# Altium PCB ESP8266Watch-v1-PCB.pcbdoc
Units mil, origin at the board's own origin, x right, y up, seen from the top; angles counter-clockwise.
Board outline 2584.8 x 2603.82 mil, 2 copper layers (Top Layer, Bottom Layer); 15 components, 16 nets, 60 pads, 6 vias.
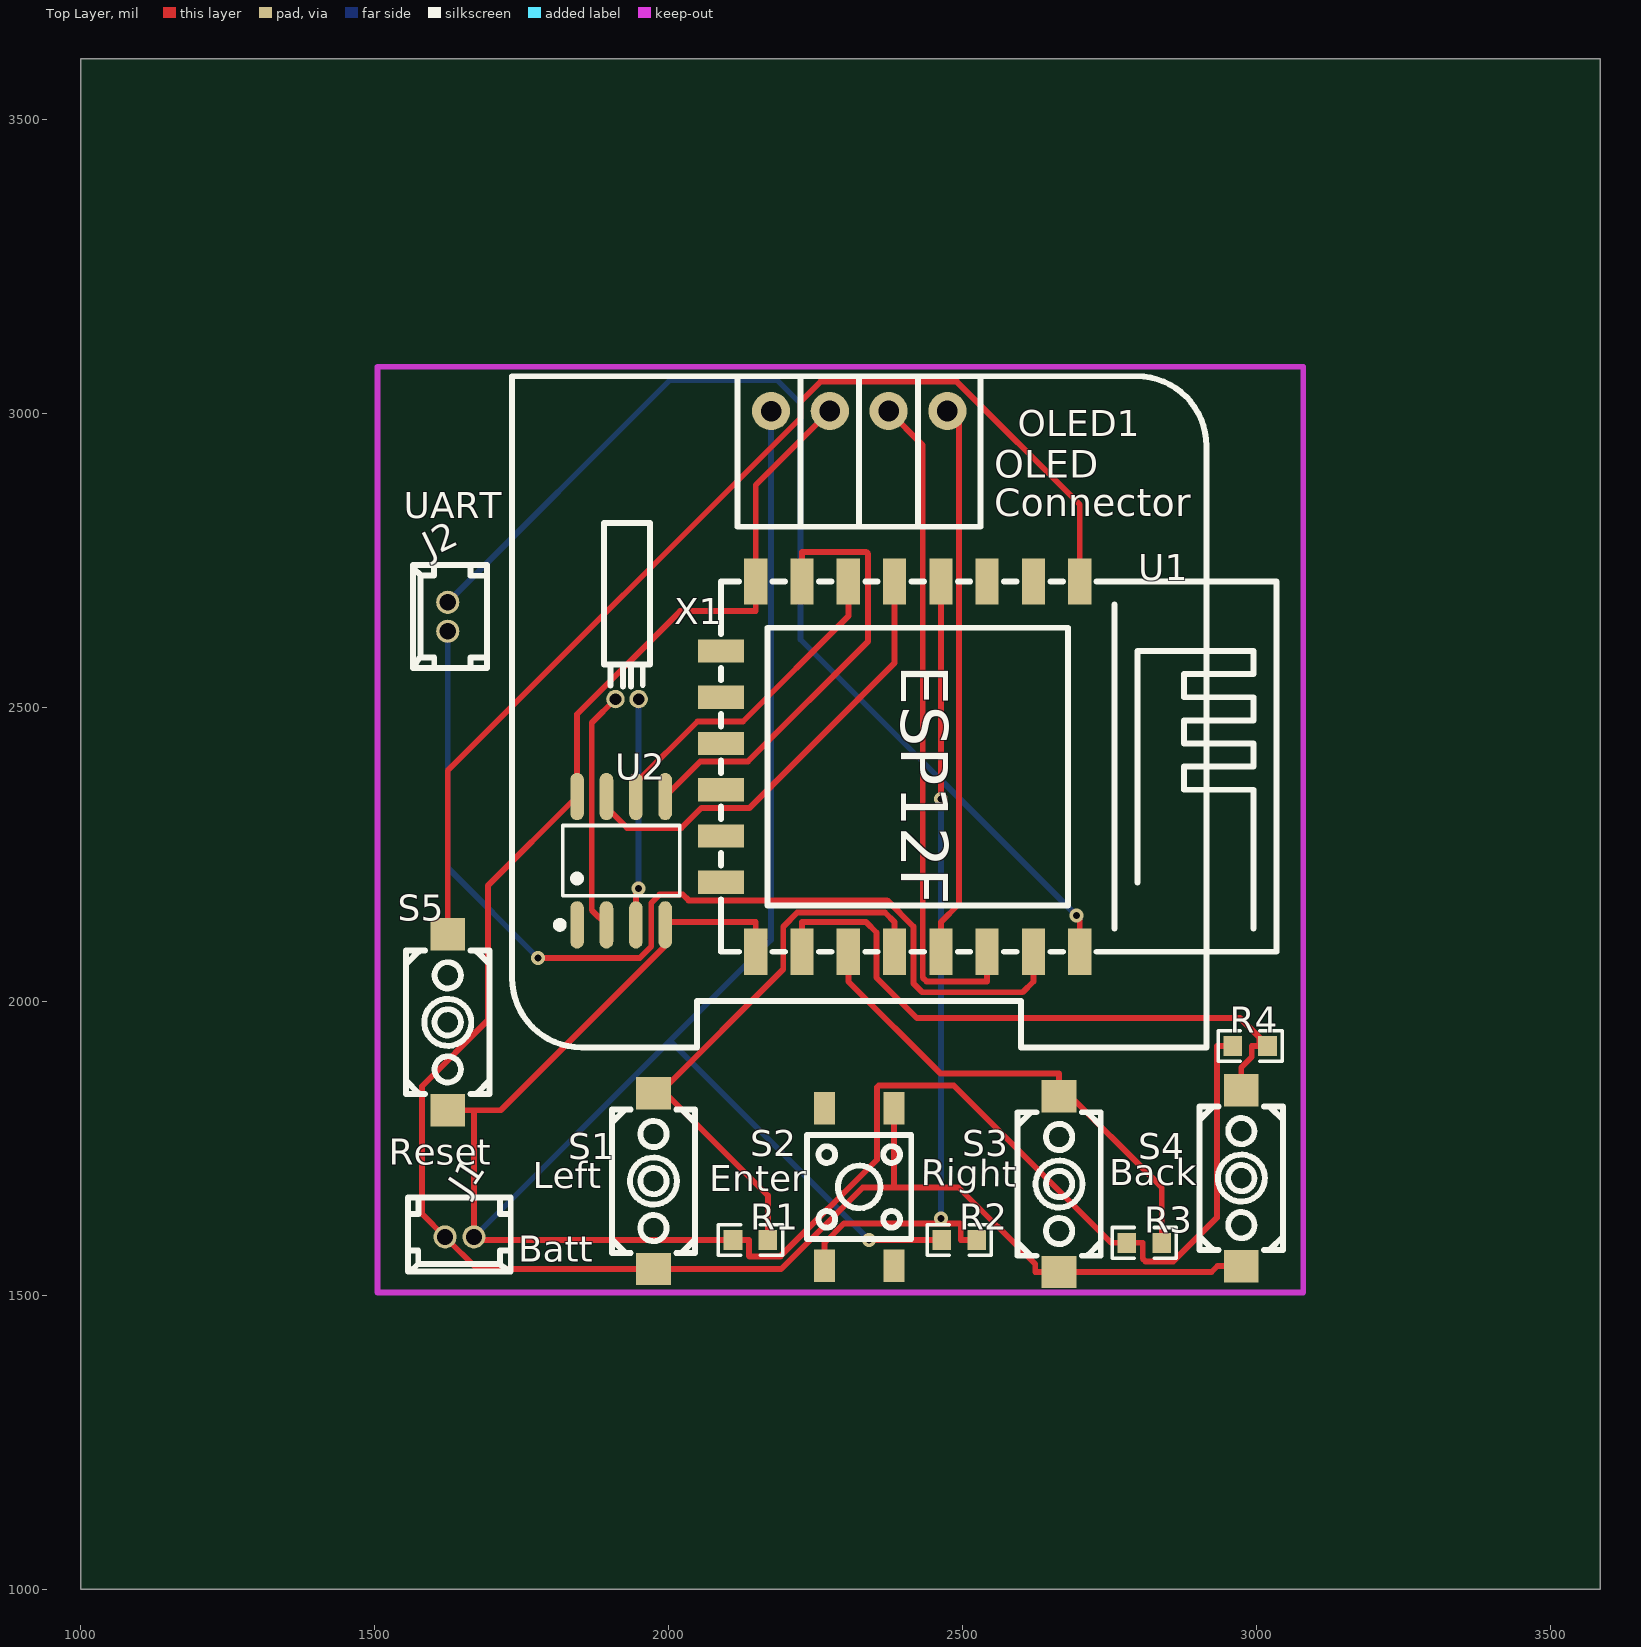
[diagram p0: Top Layer view]
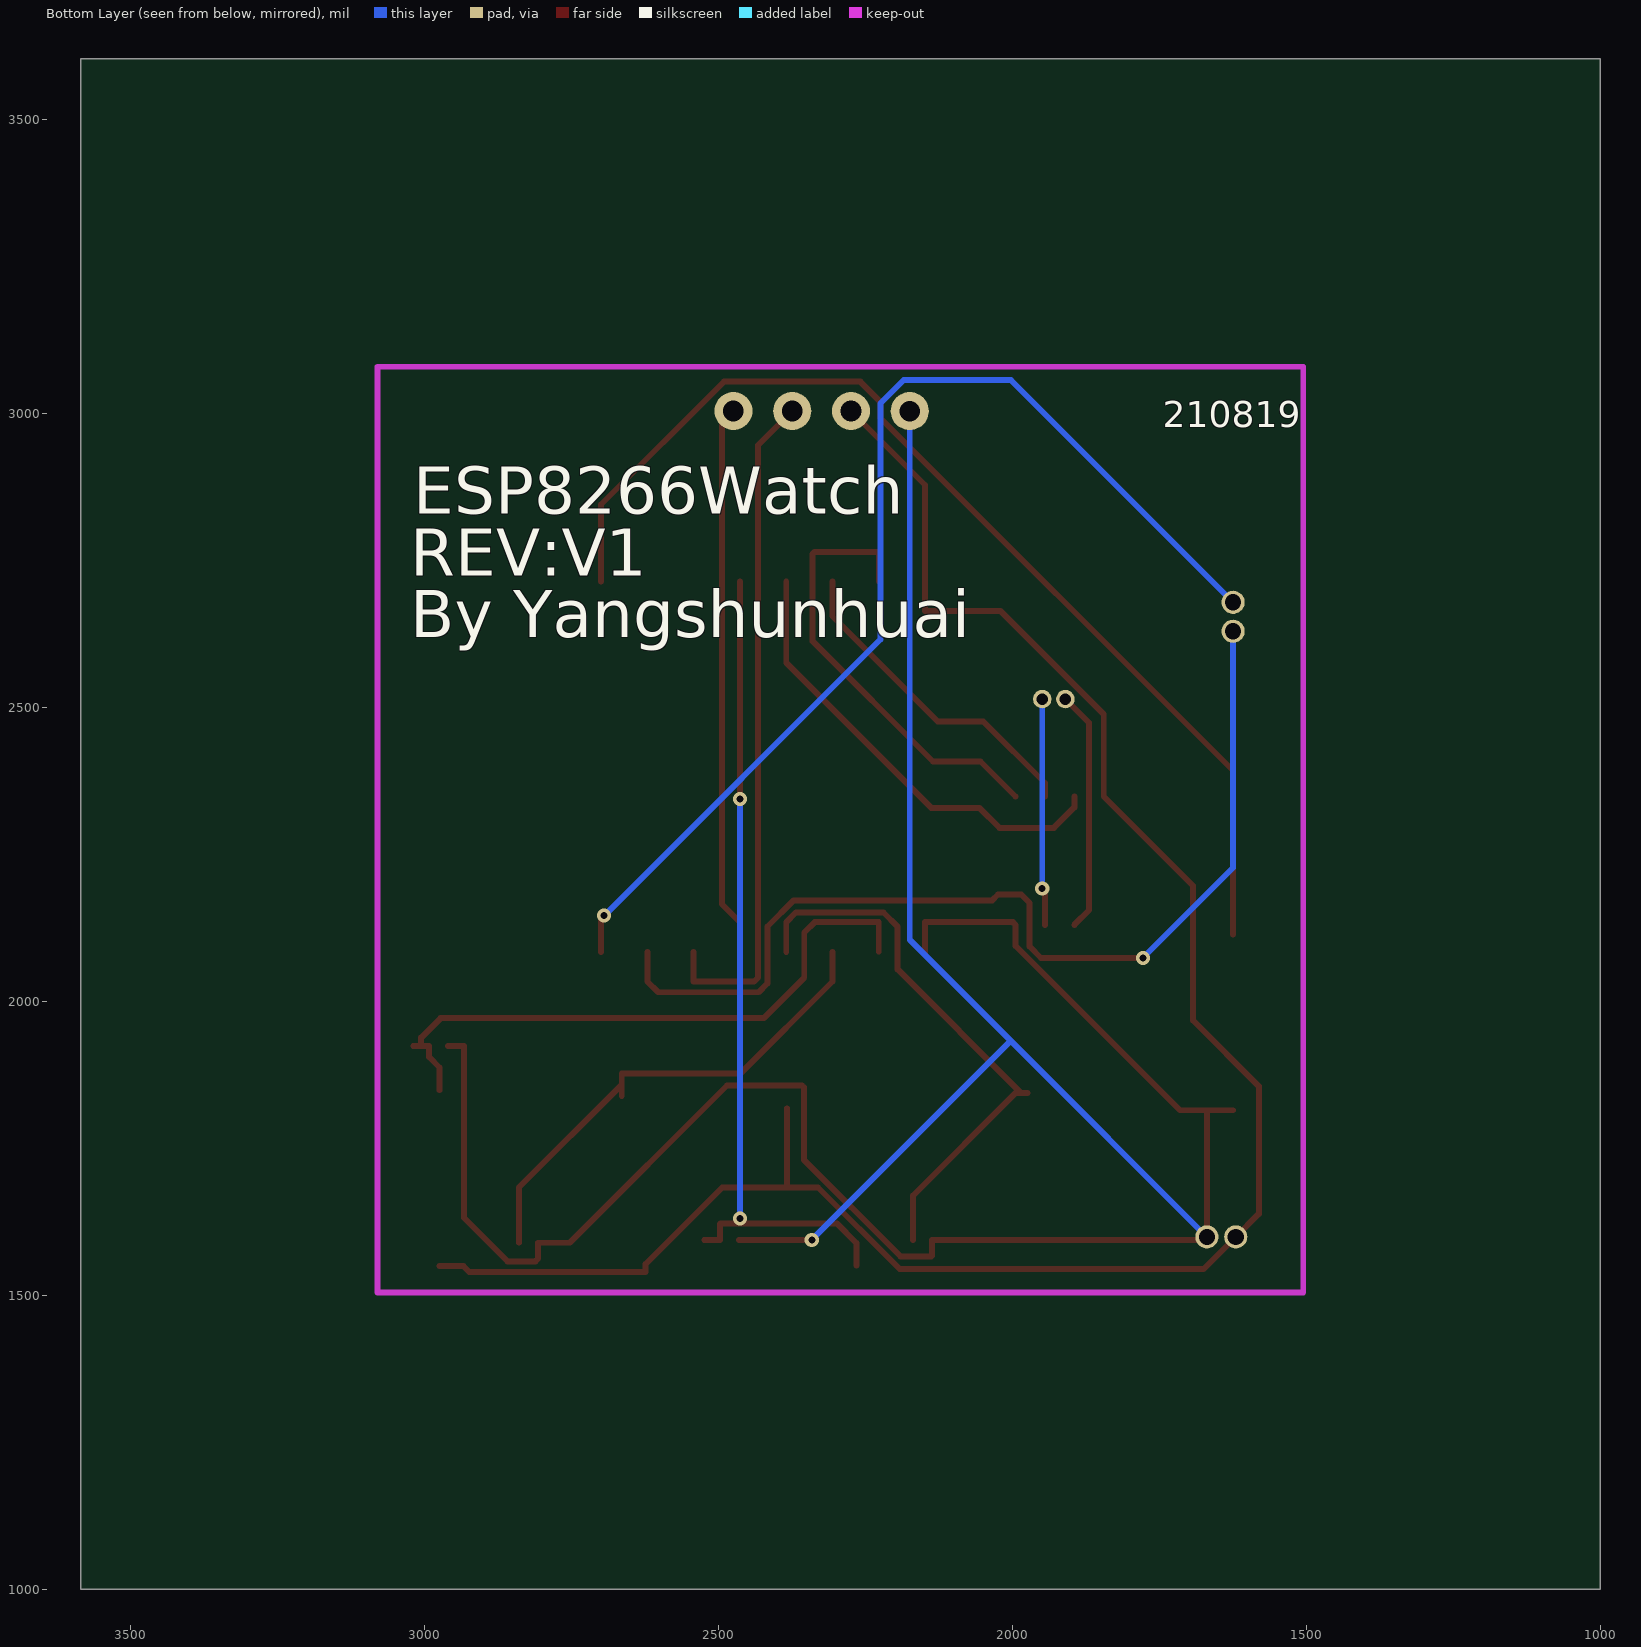
[diagram p1: Bottom Layer view, seen from below]

## Layer stack, top to bottom
Top Layer: signal copper (thickness not stored)
Dielectric: dielectric 12.6, FR-4, Dk 4.8
Bottom Layer: signal copper (thickness not stored)

## Board outline
3584.8,1000 1000,1000 1000,3603.82 3584.8,3603.82

## Components (designator, comment, footprint, x,y, rotation, side; value= is the part's Value field where it differs from the comment)
J1 "Battery" 1.25T-1-2A 1644.41,1599.45 r0 top
J2 "Serial Debug" 1.25T-1-2A 1624.41,2654.45 r270 top
OLED1 "0.96OLED_4P" 0.96OLED_4P 2324.41,3004.45 r0 top
R1 "10K" R0603 2139.41,1594.45 r0 top
R2 "10K" R0603 2494.41,1594.45 r0 top
R3 "10K" R0603 2809.41,1589.45 r0 top
R4 "10K" R0603 2989.41,1924.45 r0 top
S1 "Left" KEY-SMD_2P-L6.2-W3.6-LS8.0 1974.41,1694.45 r90 top
S2 "Enter" SW-SMD_4P-L4.5-W4.5-P3.00-LS7.0 2324.41,1684.45 r90 top
S3 "Right" KEY-SMD_2P-L6.2-W3.6-LS8.0 2664.41,1689.45 r90 top
S4 "Back" KEY-SMD_2P-L6.2-W3.6-LS8.0 2974.41,1699.45 r90 top
S5 "Reset" KEY-SMD_2P-L6.2-W3.6-LS8.0 1624.41,1964.45 r270 top
U1 "ESP-12F(ESP8266MOD)" WIFIM-SMD_ESP-12F-ESP8266MOD 2394.41,2399.45 r180 top
U2 "DS1302ZN+" SOIC-8_L4.9-W3.9-P1.27-LS6.0-BL 1919.41,2239.45 r0 top
X1 "32.768KHz" OSC-TH_BD2.0-P0.70-D0.3 1929.41,2514.45 r270 top

## Footprints (in the part's own frame and the unit in brackets; to place one, negate y for a bottom-side part, rotate by r counter-clockwise, add the part's x,y. Pads: shape width x height; smd on the part's side, far side on the other; paste and mask are expansions set on the pad)
0.96OLED_4P [mm]
  round 1.65 hole 0.89: 1(-3.81,-0.001) 2(-1.27,0.002) 3(1.27,0.002) 4(3.81,0.002)
  silkscreen extent -15,-27.5 15,1.5
1.25T-1-2A [mm]
  round 1 hole 0.7: 1(-0.625,0) 2(0.625,0)
  silkscreen extent -2.23,-1.5 2.22,1.71
KEY-SMD_2P-L6.2-W3.6-LS8.0 [mm]
  rect 1.4x1.5 smd: 1(-3.8,0) 2(3.8,0)
  silkscreen extent -3.1,-1.8 3.1,1.8
OSC-TH_BD2.0-P0.70-D0.3 [mm]
  round 0.8 hole 0.5: 1(0,0.5) 2(0,-0.5)
  silkscreen extent -7.6,-1 -0.54,1
R0603 [mil]
  rect 31.75x34.02 smd: 1(-29.66,0) 2(29.65,0)
  silkscreen extent -55,-26 55,26
SOIC-8_L4.9-W3.9-P1.27-LS6.0-BL [mm]
  oval 0.588x2.045 smd: 1(-1.905,-2.773) 2(-0.635,-2.773) 3(0.635,-2.773) 4(1.905,-2.773) 5(1.905,2.773) 6(0.635,2.773) 7(-0.635,2.773) 8(-1.905,2.773)
  silkscreen extent -2.8,-2.92 2.53,1.52
SW-SMD_4P-L4.5-W4.5-P3.00-LS7.0 [mm]
  rect 1.4x0.9 smd: 1(-3.4,1.5) 2(3.4,1.5) 3(-3.4,-1.5) 4(3.4,-1.5)
  silkscreen extent -2.25,-2.25 2.25,2.25
WIFIM-SMD_ESP-12F-ESP8266MOD [mm]
  rect 1x2 smd: 1(-7.751,-8.002) 2(-5.751,-8.002) 3(-3.751,-8.002) 4(-1.751,-8.002) 5(0.249,-8.002) 6(2.249,-8.002) 7(4.249,-8.002) 8(6.249,-8.001) 9(6.249,7.999) 10(4.249,8) 11(2.249,8.002) 12(0.249,8.001) 13(-1.751,8) 14(-3.751,8.001) 15(-5.751,8) 16(-7.751,8.001)
  rect 2x1 smd: 17(7.75,-5) 18(7.749,-3.002) 19(7.749,-1.003) 20(7.749,0.998) 21(7.749,2.997) 22(7.75,4.997)
  silkscreen extent -16.25,-8 7.75,8

## Via types
v1: diameter 24.02, hole 12.01, Top Layer to Bottom Layer, 6 vias

## Nets (pads, with @x,y where several pads share a name; then routed paths per layer and width w, separated by ;. In a path a pad name is that pad's centre, name@x,y a point inside that pad or via, vN(x,y) a via of type N, cw(c..) or ccw(c..) an arc to the next point about the centre after c; other vN are vias at no path point)
GND: J1.2 OLED1.1 R1.1 R2.1 R3.1 R4.1 S5.2 U1.9 U2.4 | length 5135.6
  Top Layer w10: S5.2@1624.41,1814.85 1669.01,1814.85 ; U1.9 2148.37,2134.98 1999.09,2134.98 U2.4 1994.41,2094.62 1714.64,1814.85 1669.01,1814.85 ; v1(2341.07,1594.45) R2.1@2464.75,1594.45 ; R4.1@2959.75,1924.45 2932.81,1924.45 2932.81,1632.07 2858.63,1557.89 2811.31,1557.89 2806.7,1562.5 2806.7,1589.45 2793.23,1589.45 2779.75,1589.45 2752.81,1589.45 2485.31,1856.95 2357.59,1856.95 2354.66,1854.02 2354.66,1730.72 2190.3,1566.36 2137.84,1566.36 2136.7,1567.5 2136.7,1594.45 2109.75,1594.45 1674.01,1594.45 1669.01,1599.45 1669.01,1814.85
  Bottom Layer w10: J1.2@1669.01,1599.45 2002.54,1932.98 ; OLED1.1 2174.41,2104.85 2002.54,1932.98 ; v1(2341.07,1594.45) 2002.54,1932.98
U1_1: S5.1 U1.1 | length 1861.7
  Top Layer w10: S5.1 1624.41,2392.79 2224.37,2992.75 2224.37,3020.41 2258.42,3054.46 2490.57,3054.46 2699.56,2845.47 U1.1@2699.56,2714.47
U1_4: R2.2 S2.1 U1.4 | length 1430.5
  Top Layer w10: S2.1@2265.35,1550.59 2265.35,1589.22 2298.67,1622.54 v1@2463.34,1622.54 ; v1(2463.34,1630.54) v1@2463.34,1622.54 ; v1(2463.34,2344.16) U1.4 ; R2.2@2524.07,1594.45 2497.12,1594.45 2497.12,1621.4 2495.98,1622.54 v1@2463.34,1622.54
  Bottom Layer w10: v1(2463.34,1630.54) v1(2463.34,2344.16)
U1_5: U1.5 U2.7 | length 777.7
  Top Layer w10: U2.7 1894.41,2330.17 1929.23,2295.35 2021.92,2295.35 2055.98,2329.41 2137.93,2329.41 2384.6,2576.08 U1.5
U1_6: U1.6 U2.6 | length 561
  Top Layer w10: U2.6 1944.41,2371.52 2049.32,2476.43 2126.78,2476.43 2305.85,2655.5 U1.6
U1_7: U1.7 U2.5 | length 767.6
  Top Layer w10: U2.5 2053.99,2408.18 2134.93,2408.18 2339.6,2612.85 2339.6,2761.43 2336.12,2764.91 2227.11,2764.91 U1.7
U1_10: R4.2 S4.2 U1.10 | length 1078.9
  Top Layer w10: U1.10 2227.11,2134.92 2336.12,2134.92 2353.83,2117.21 2353.83,2040.52 2422.72,1971.63 2972.47,1971.63 3005.6,1938.5 R4.2@3005.6,1924.45 ; S4.2 2974.41,1887.68 2992.12,1905.39 2992.12,1924.45 R4.2@3005.6,1924.45 ; R4.2@3019.07,1924.45 R4.2@3005.6,1924.45
U1_11: R3.2 S3.2 U1.11 | length 853.6
  Top Layer w10: U1.11 2305.85,2033.99 2462.16,1877.68 2664.41,1877.68 S3.2@2664.41,1858.37 ; S3.2 S3.2@2664.41,1858.37 ; R3.2@2839.07,1589.45 2839.07,1683.71 S3.2@2664.41,1858.37
U1_12: R1.2 S1.2 U1.12 | length 969.3
  Top Layer w10: S1.2 S1.2@1984.56,1844.05 ; R1.2@2169.07,1594.45 2169.07,1669.69 1994.71,1844.05 S1.2@1984.56,1844.05 ; U1.12 2384.6,2134.9 2368.19,2151.31 2219.06,2151.31 2195.07,2127.32 2195.07,2054.56 S1.2@1984.56,1844.05
U1_13: OLED1.4 U1.13 | length 940.9
  Top Layer w10: U1.13 2463.34,2134.93 2494.09,2165.68 2494.09,2984.82 OLED1.4
U1_14: OLED1.3 U1.14 | length 1150.7
  Top Layer w10: OLED1.3 2432.58,2946.33 2432.58,2040.54 2439.1,2034.02 2542.07,2034.02 U1.14
U1_15: J2.2 U1.15 | length 1734
  Top Layer w10: v1(1777.84,2074.07) 1951.1,2074.07 1970.54,2093.51 1970.54,2167.65 1984.86,2181.97 2024.16,2181.97 2034.17,2171.96 2371.94,2171.96 2416.48,2127.42 2416.48,2030.76 2431.54,2015.7 2602.48,2015.7 2620.81,2034.03 U1.15
  Bottom Layer w10: J2.2@1624.41,2629.85 1624.41,2227.5 v1(1777.84,2074.07)
U1_16: J2.1 U1.16 | length 1902.7
  Top Layer w10: v1(2694.31,2145.93) 2699.56,2140.68 U1.16@2699.56,2084.46
  Bottom Layer w10: J2.1@1624.41,2679.05 2002.46,3057.1 2184.58,3057.1 2224.47,3017.21 2224.47,2615.77 v1(2694.31,2145.93)
VCC3V: J1.1 OLED1.2 S1.1 S2.4 S3.1 S4.1 U1.8 U2.8 | length 3424.9
  Top Layer w10: OLED1.2 2148.37,2878.46 U1.8 2148.37,2664 2019.79,2664 1844.41,2488.62 U2.8 1692.57,2196.76 1692.57,1967.82 1580.55,1855.8 1580.55,1638.71 1619.81,1599.45 1674.41,1544.85 1974.41,1544.85 2191.55,1544.85 2330.37,1683.67 2383.46,1683.67 ; S2.4 2383.46,1683.67 ; S4.1@2974.41,1549.85 2933.81,1549.85 2923.81,1539.85 2705.01,1539.85 2684.71,1539.85 2664.41,1539.85 2623.81,1539.85 2623.81,1553.22 2493.36,1683.67 2383.46,1683.67
X1_1: U2.3 X1.1 | length 386.1
  Top Layer w10: U2.3 1944.41,2187.28 v1(1949.09,2191.96)
  Bottom Layer w10: v1(1949.09,2191.96) X1.1@1949.09,2514.45
X1_2: U2.2 X1.2 | length 411.2
  Top Layer w10: U2.2 1869.42,2155.29 1869.42,2474.15 X1.2@1909.72,2514.45
pads on no net: S2.2 S2.3 U1.2 U1.3 U1.17 U1.18 U1.19 U1.20 U1.21 U1.22 U2.1

## Silkscreen, mask and mechanical layers (free items; w line width, h text height)
Top Overlay:
  text "UART" at 1549.41,2821.95 h45
  text "Reset" at 1524.41,1721.95 h45
  text "Right" at 2429.02,1686.95 h45 r359
  text "Back" at 2749.41,1686.95 h45
  text "Left" at 1769.41,1681.95 h45
  text "Enter" at 2069.41,1676.95 h45
  text "Batt" at 1744.41,1556.95 h45
Bottom Overlay:
  text "210819" at 1744.41,2976.95 h45
  text "ESP8266Watch" at 3019.41,2829.45 h80
  text "REV:V1" at 3024.41,2724.45 h80
  text "By Yangshunhuai" at 3024.41,2619.45 h80

## Text inside footprints (layer, text, board x,y; h text height)
OLED1: Top Overlay "Connector" at 2554.41,2825.83 h47.24; Top Overlay "OLED" at 2554.41,2890.83 h47.24
U1: Top Overlay "ESP12F" at 2395.74,2572.77 h80 r270